# Altium PCB driver.PcbDoc
Units mm, origin at the board's own origin, x right, y up, seen from the top; angles counter-clockwise.
Board outline 152.4 x 101.6 mm, 2 copper layers (Top Layer, Bottom Layer); 3 components, 3 nets, 10 pads, 0 vias.
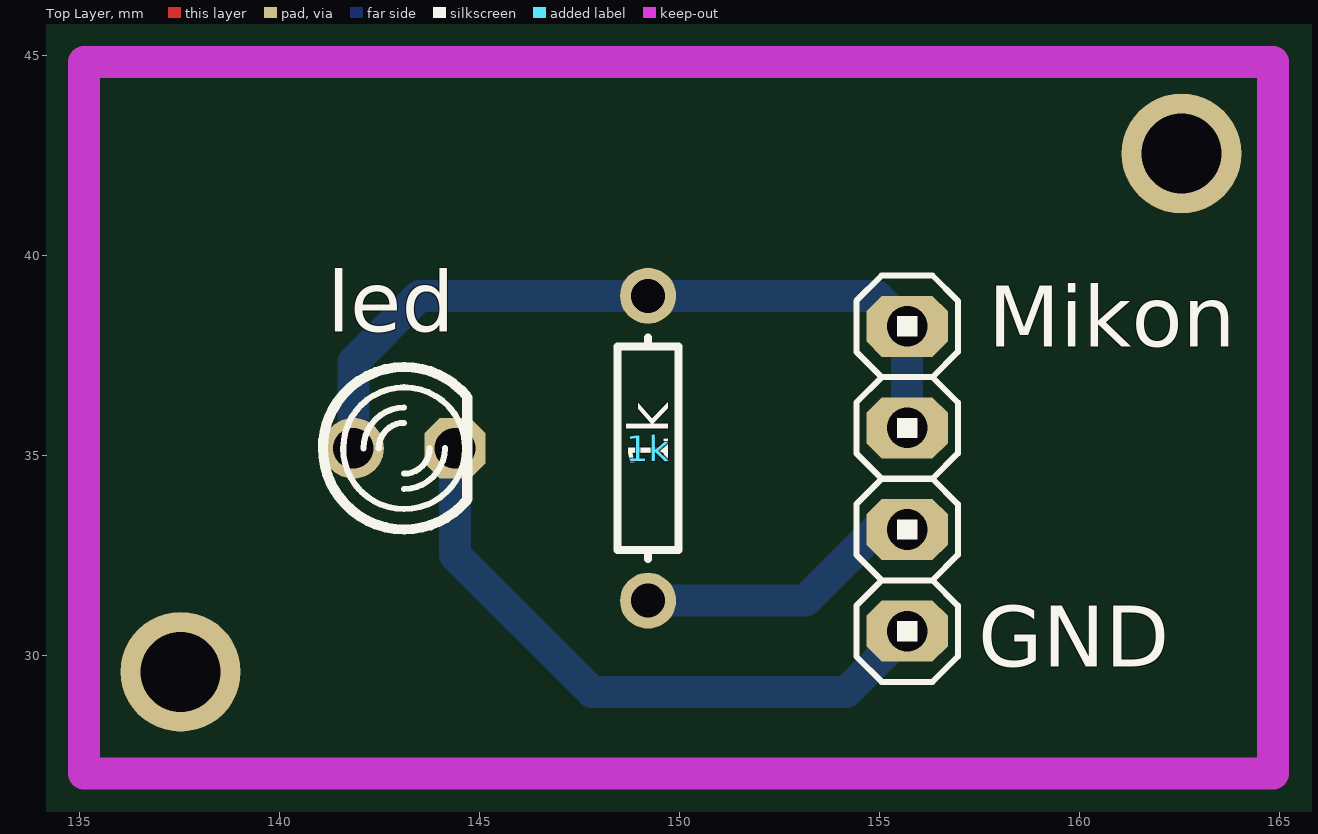
[diagram p0: Top Layer view]
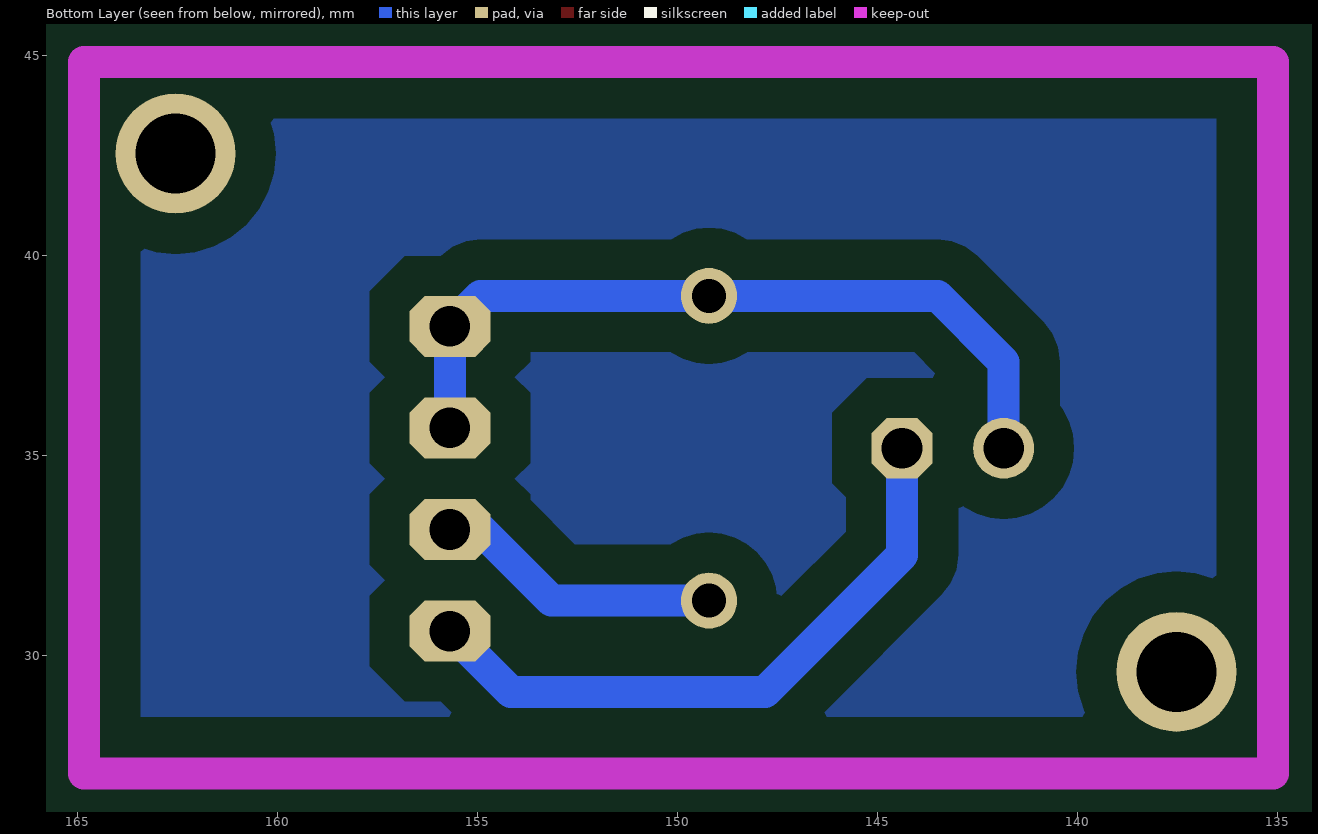
[diagram p1: Bottom Layer view, seen from below]

## Layer stack, top to bottom
Top Layer: signal copper 0.0356
Dielectric: dielectric 0.32, FR-4, Dk 4.8
Bottom Layer: signal copper 0.0356

## Board outline
25.4,25.4 177.8,25.4 177.8,127 25.4,127

## Design rules (kind name [scope] priority, off if disabled: settings)
Clearance [All] p1: gap=0.1
PolygonConnect [All] p1: connectstyle=Relief reliefconductorwidth=0.254 reliefentries=4 polygonreliefangle="90 Angle"
RoutingVias [All] p1: holewidth=0.711 width=1.27 viastyle="Through Hole" minholewidth=0.711 minwidth=1.27 maxholewidth=0.711 maxwidth=1.27
SilkscreenOverComponentPads [All] p1: minsilkscreentomaskgap=0.254
SolderMaskExpansion [All] p1: expansion=0.102
Width [All] p1: maxlimit=0.8 minlimit=0.8 preferedwidth=0.8
27 further rules are at their usual default settings.

## Components (designator, comment, footprint, x,y, rotation, side; value= is the part's Value field where it differs from the comment)
1k "1k" AXIAL-0.3 149.225,35.179 r90 top (schematic designator R?)
led "LED" My_LED3MM 143.129,35.179 r0 top (schematic designator D?)
Mikon "GND" My_1X04 155.702,34.417 r90 top (schematic designator P1)

## Footprints (in the part's own frame and the unit in brackets; to place one, negate y for a bottom-side part, rotate by r counter-clockwise, add the part's x,y. Pads: shape width x height; smd on the part's side, far side on the other; paste and mask are expansions set on the pad)
AXIAL-0.3 [mm] "Axial Device, Thru-Hole; 2 Leads; 0.3 in Pin Spacing"
  round 1.4 hole 0.85: 1(-3.81,0) 2(3.81,0)
  silkscreen extent -2.77,-0.76 2.77,0.76
My_1X04 [mil]
  oct 60x80 hole 40: 1(-150,0) 2(-50,0) 3(50,0) 4(150,0)
  silkscreen extent -200,-50 200,50
My_LED3MM [mil]
  round 60 hole 40: A(-50,0)
  oct 60x60 hole 40: K(50,0)
  silkscreen extent -80,-80 62,80

## Part data
1k: library part Res1, "Resistor"
led: "Typical INFRARED GaAs LED"
Mikon: library part "Header 4", "Header, 4-Pin"

## Free pads (board coordinates)
  round 3 hole 2: 0(162.56,42.545) 1(137.541,29.591)

## Nets (pads, with @x,y where several pads share a name; then routed paths per layer and width w, separated by ;. In a path a pad name is that pad's centre, name@x,y a point inside that pad or via, vN(x,y) a via of type N, cw(c..) or ccw(c..) an arc to the next point about the centre after c; other vN are vias at no path point)
GND: led.K Mikon.1 | length 16
  Bottom Layer w0.8: led.K 144.399,32.512 147.828,29.083 154.178,29.083 Mikon.1
NetD?_A: 1k.2 led.A Mikon.3 Mikon.4 | length 19.5
  Bottom Layer w0.8: led.A 141.859,37.338 143.51,38.989 1k.2 154.94,38.989 Mikon.4 Mikon.3
VCC: 1k.1 Mikon.2 | length 7.2
  Bottom Layer w0.8: 1k.1 153.162,31.369 154.94,33.147 Mikon.2

## Polygon pours and split planes (outlines as drawn)
no net on Bottom Layer "TopLayer-No Net" (solid): 135.128,44.831 164.592,44.831 164.592,27.178 164.465,27.051 164.211,27.305 135.382,27.305

## Keep-outs
Keep-Out Layer:
  lines w0.8: 135.128,27.051 135.128,44.831 140.462,44.831 164.846,44.831 164.846,27.051 135.128,27.051